# Altium PCB PCB_Proyecto_Analoga.PcbDoc
Units mil, origin at the board's own origin, x right, y up, seen from the top; angles counter-clockwise.
Board outline 3860 x 2615 mil, 2 copper layers (Top Layer, Bottom Layer); 40 components, 26 nets, 90 pads, 0 vias.
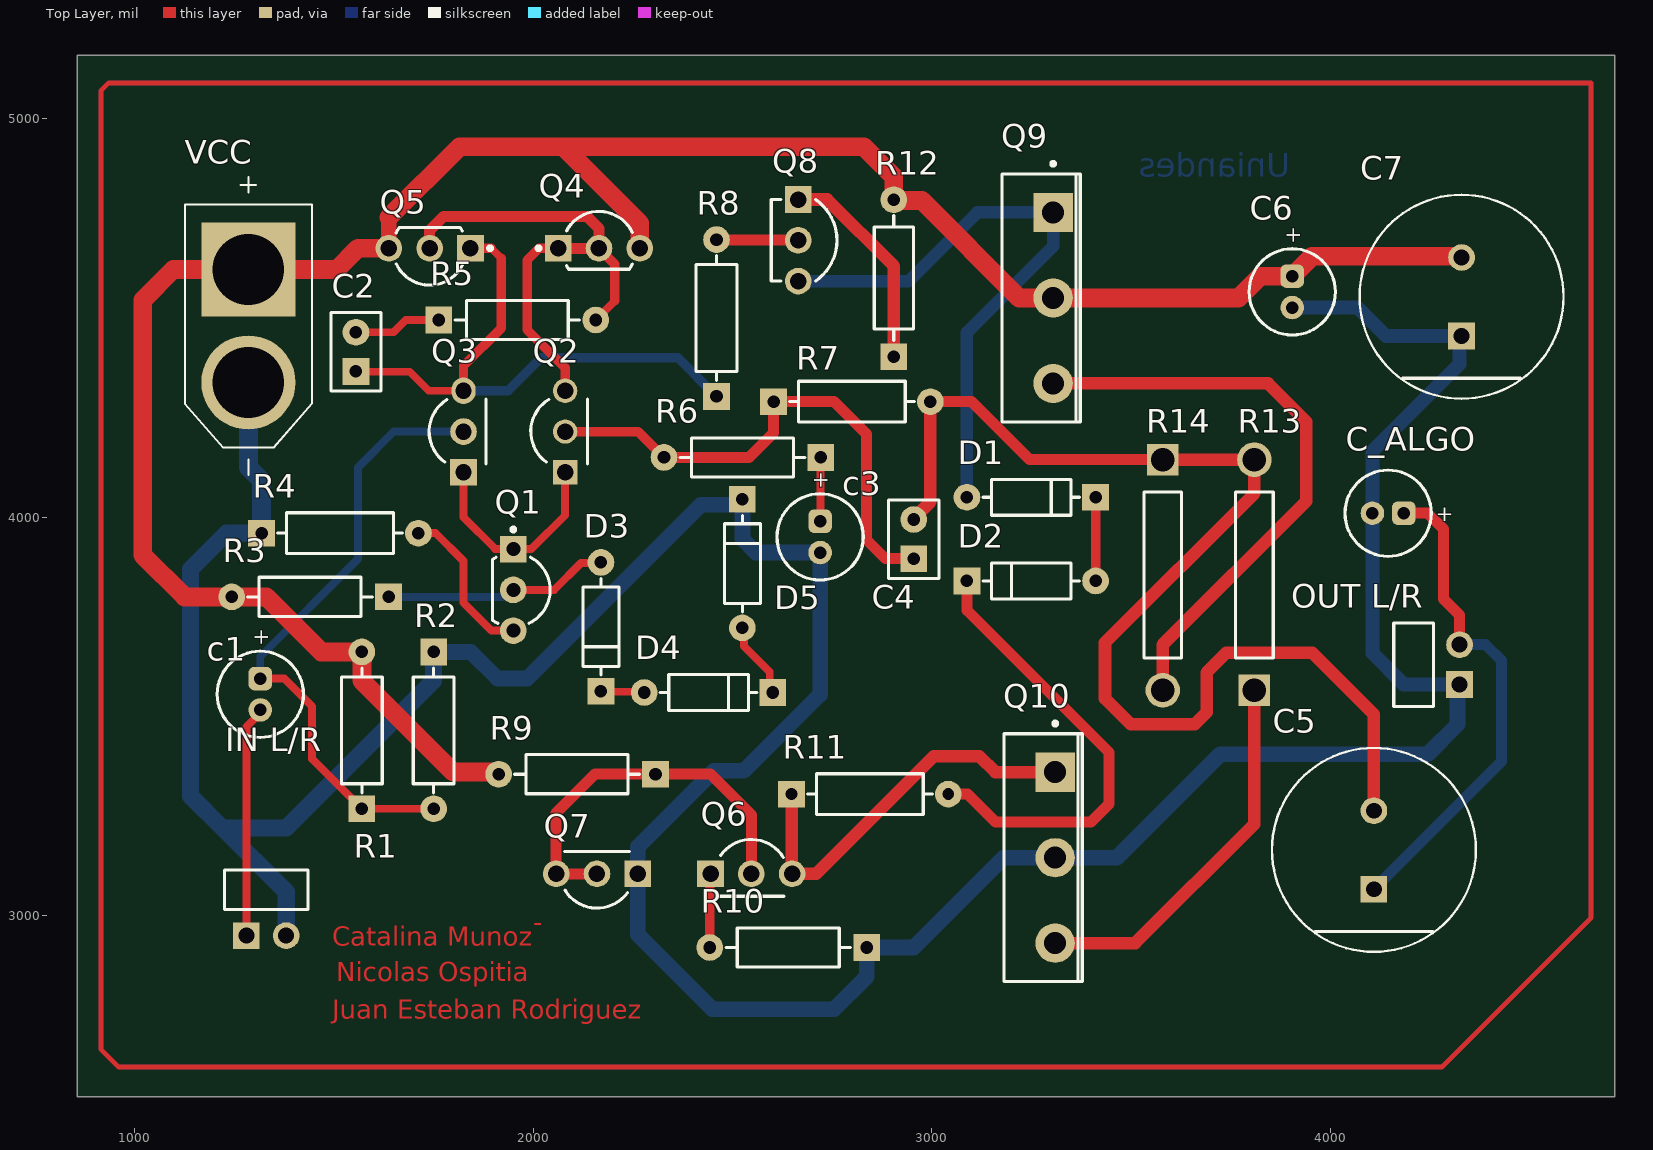
[diagram p0: Top Layer view]
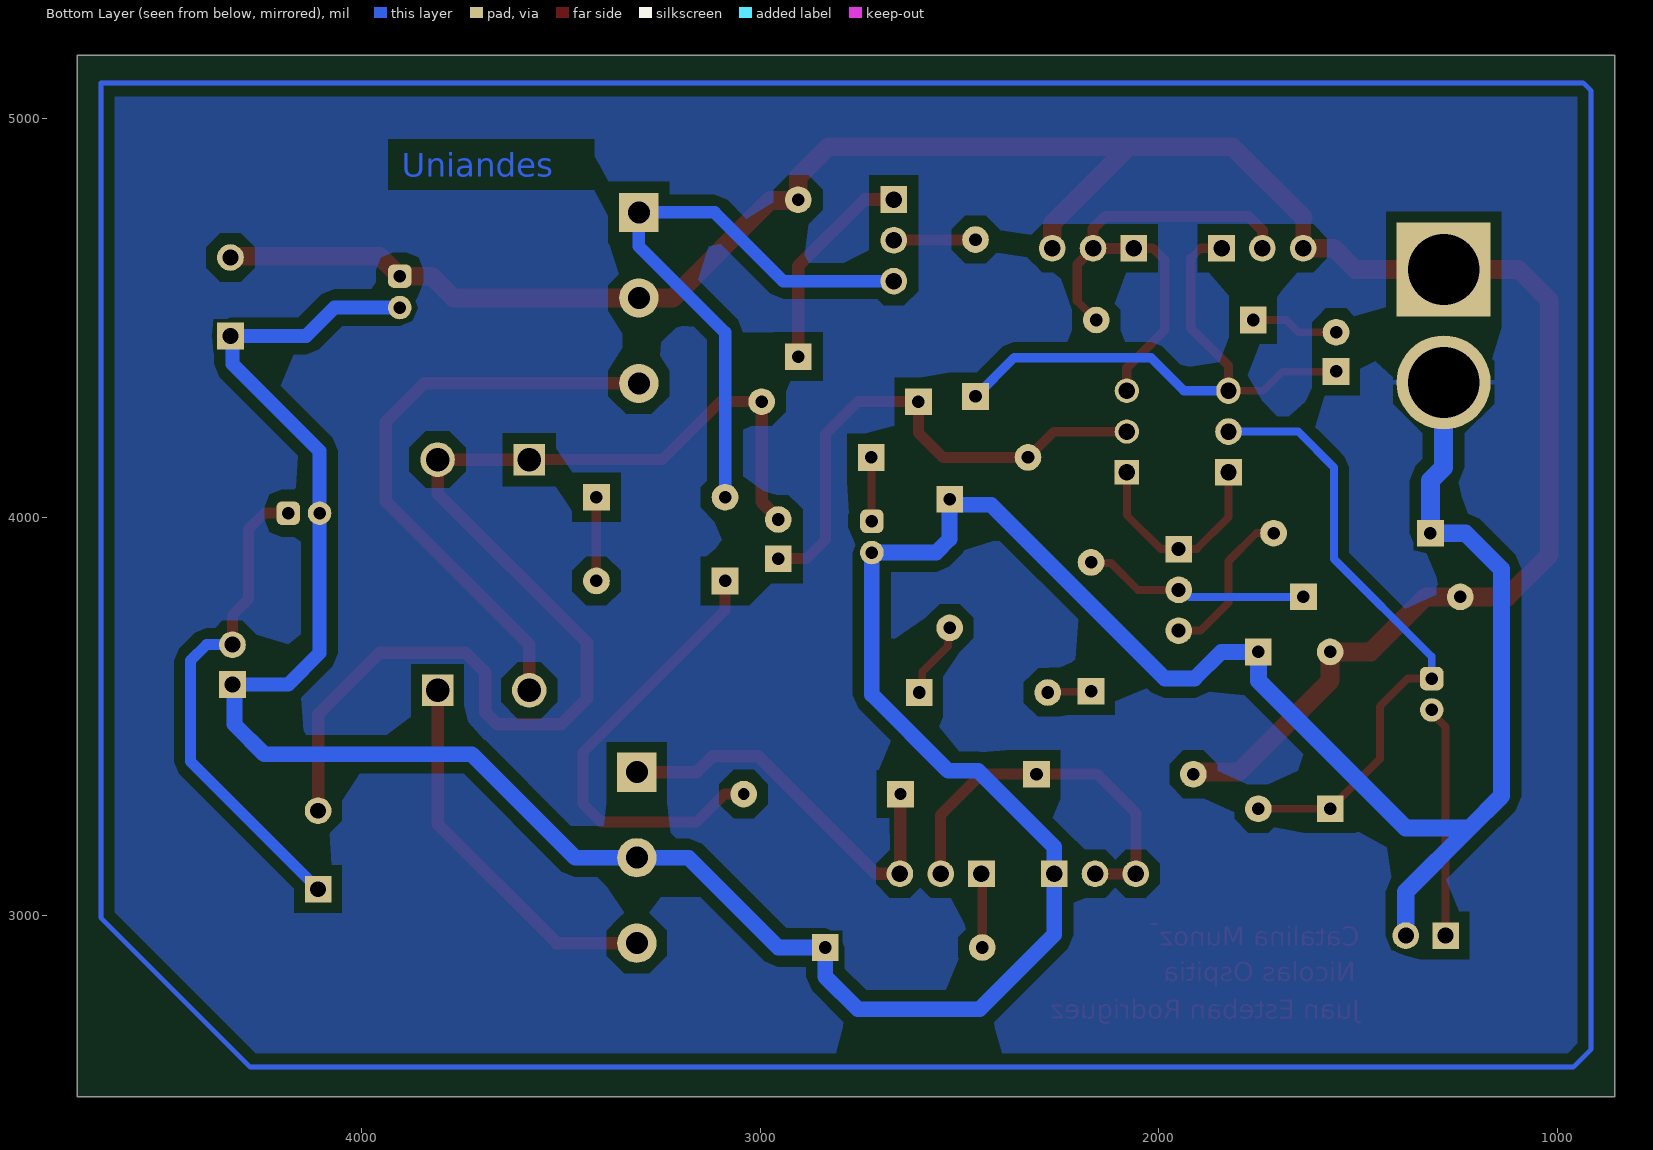
[diagram p1: Bottom Layer view, seen from below]
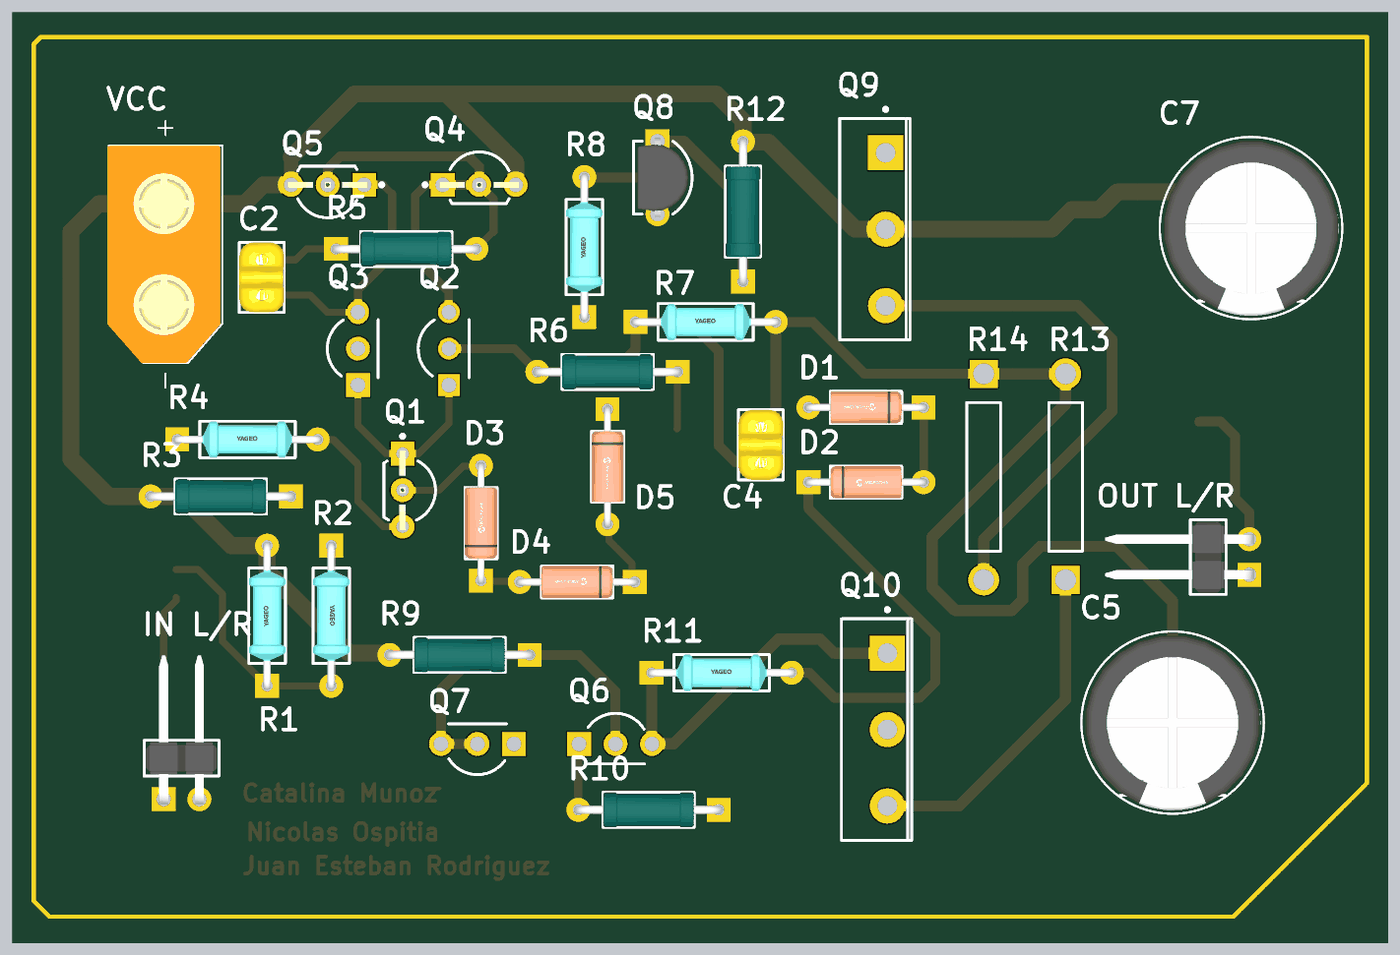
[diagram p2: 3D render of the assembled board from above, using the file's embedded part models]

## Layer stack, top to bottom
Top Solder: solder mask 0.4, Solder Resist, Dk 3.5
Top Layer: signal copper 1.4
Dielectric 1: dielectric 12.6, FR-4, Dk 4.8
Bottom Layer: signal copper 1.4
Bottom Solder: solder mask 0.4, Solder Resist, Dk 3.5

## Board outline
855,2545 4715,2545 4715,5160 855,5160

## Design rules (kind name [scope] priority, off if disabled: settings)
Clearance [All] p1: gap=19.68 ignorepadtopadclearanceinfootprint=FALSE except(23.62: Via-Fill Via-Poly Via-Region Fill-Text Fill-Hole Poly-Text Poly-Hole Region-Text Region-Hole; 25.59: Arc-Fill Arc-Poly Arc-Region Track-Fill Track-Poly Track-Region Fill-Fill Fill-Poly Fill-Region Poly-Poly Poly-Region Region-Region; 27.56: SMDPad-Fill SMDPad-Poly SMDPad-Region THPad-Fill THPad-Poly THPad-Region)
PolygonConnect [All] p1: connectstyle=Relief reliefconductorwidth=10 reliefentries=4 polygonreliefangle="90 Angle" airgapwidth=10
RoutingVias [All] p1: holewidth=28 width=50 viastyle="Through Hole" minholewidth=28 minwidth=50 maxholewidth=28 maxwidth=50
SolderMaskExpansion [All] p1: expansion=4 istentingtop=FALSE
Width [All] p1: maxlimit=59.06 minlimit=11.81 preferedwidth=23.62
30 further rules are at their usual default settings.

## Components (designator, comment, footprint, x,y, rotation, side; value= is the part's Value field where it differs from the comment)
c1 "47u" WCAP-ATG5_D5H11 -48685,53555.63 r90 top
C2 "1.5nF" FP-K105Z20Y5VF5TL2-MFG 1555,4415 r90 top value=1uF
c3 "47u" WCAP-ATG5_D5H11 -47280,53950.63 r90 top
C4 "1.5nF" FP-K105Z20Y5VF5TL2-MFG 2955,3945 r90 top value=1uF
C5 "2200uF, 25V" FP-RAD-TH-D_12_5_0_5-L_35-MFG 4110,3165 r90 top
C6 "10u, 25V" WCAP-ATG5_D5H11 -46095,54565.63 r90 top
C7 "2200uF, 25V" FP-RAD-TH-D_12_5_0_5-L_35-MFG 4330,4553.43 r90 top
C_ALGO "ALGO" WCAP-ATG5_D5H11 54145.63,54010 r0 top
D1 "1N4148" FP-DO-35-MFG 3250,4050 r180 top
D2 "1N4148" FP-DO-35-MFG 3250,3840 r0 top
D3 "1N4148" FP-DO-35-MFG 2170,3725 r90 top
D4 "1N4148" FP-DO-35-MFG 2440,3560 r180 top
D5 "1N4148" FP-DO-35-MFG 2525,3883.58 r270 top
"IN L/R" "Audio IN" FP-22-28-8020-MFG 1330,3065 r0 top
"OUT L/R" "Speaker" FP-22-28-8020-MFG 4209.84,3630 r90 top
Q1 "BC548" ONSC-TO-92-3-29-11_AM_BL#1 1950,3817.64 r270 top
Q2 "2N2222" FAIR-TO-92-3#1 2080,4215 r90 top
Q3 "2N2222" FAIR-TO-92-3#2 1825,4215 r90 top
Q4 "BC558" ONSC-TO-92-3-29-11_AM_BL#2 2165,4675 r0 top
Q5 "BC558" ONSC-TO-92-3-29-11_AM_BL#2 1740,4675 r180 top
Q6 "NTE123AP" FAIR-TO-92-3#3 2547.36,3105 r0 top
Q7 "NTE123AP" FAIR-TO-92-3#3 2160,3105 r180 top
Q8 "NTE159" FP-135AR-MFG 2680,4695 r0 top
Q9 "D718" ONSC-TO-3P-3LD-3-340AB-01 3305,4550.43 r0 top
Q10 "B688" ONSC-TO-3P-3LD-3-340AB-01 3310,3145.43 r0 top
R1 "10k, 1%, 0.6W" FP-MF0207-MFG#1 1570,3465 r90 top
R2 "10k, 1%, 0.6W" FP-MF0207-MFG#1 1750,3465 r270 top
R3 "8.2k, 1%, 0.6W" FP-MRS25-MFG 1440,3800 r180 top
R4 "2.7k, 1%, 0.6W" FP-MF0207-MFG#1 1515,3960 r0 top
R5 "100, 1%. 0.6W" FP-MRS25-MFG 1960,4495 r0 top
R6 "100, 1%. 0.6W" FP-MRS25-MFG 2525,4150 r180 top
R7 "5k, 1%, 0.6W" FP-MF0207-MFG#1 2800,4290 r0 top
R8 "10k, 1%, 0.6W" FP-MF0207-MFG#1 2460,4500 r90 top
R9 "470, 1%, 0.6W" FP-MRS25-MFG 2110,3355 r180 top
R10 "10, 1%, 0.6W" FP-MRS25-MFG 2640,2920 r180 top
R11 "300, 1%, 0.6W" FP-MF0207-MFG#2 2845,3305 r0 top
R12 "10, 1%, 0.6W" FP-MRS25-MFG 2905,4600 r90 top
R13 "1 ohm, 1%, 2w" RESA86-1060X240 3810,3855 r90 top
R14 "1 ohm, 1%, 2w" RESA86-1060X240 3580,3855 r270 top
VCC "XT60-M" AMASS_XT60-M 1285,4480 r270 top

## Footprints (in the part's own frame and the unit in brackets; to place one, negate y for a bottom-side part, rotate by r counter-clockwise, add the part's x,y. Pads: shape width x height; smd on the part's side, far side on the other; paste and mask are expansions set on the pad)
AMASS_XT60-M [mm]
  round 6 hole 4.55: N(3.6,0)
  rect 6x6 / inner round 6 / far side rect 6x6 hole 4.55: P(-3.6,0)
  silkscreen extent -9.5,-4.05 9.5,4.05, body extent -7.75,-4.16 7.75,3.94, height 16.03
FAIR-TO-92-3#1 [mm] "TO, 3-Leads, Body Dia 4.79mm, Pitch 2.6mm"
  rect 1.55x1.55 hole 1.05: 1(-2.6,0)
  round 1.55 hole 1.05: 2(0,0) 3(2.6,0)
  silkscreen extent -2.07,-1.43 2.07,2.19, body extent -2.4,-1.47 2.4,2.2, height 8.49
FAIR-TO-92-3#2 [mm] "TO, 3-Leads, Body Dia 4.79mm, Pitch 2.6mm"
  rect 1.7x1.7 hole 1.05: 1(-2.6,0)
  round 1.7 hole 1.05: 2(0,0)
  oval 1.7x1.55 hole 1.05: 3(2.6,0)
  silkscreen extent -2.07,-1.43 2.07,2.19, body extent -2.4,-1.47 2.4,2.2, height 8.49
FAIR-TO-92-3#3 [mm] "TO, 3-Leads, Body Dia 4.79mm, Pitch 2.6mm"
  rect 1.7x1.7 hole 1.05: 1(-2.6,0)
  round 1.7 hole 1.05: 2(0,0) 3(2.6,0)
  silkscreen extent -2.07,-1.43 2.07,2.19, body extent -2.4,-1.47 2.4,2.2, height 8.49
FP-22-28-8020-MFG [mm]
  rect 1.7x1.7 hole 1.02 paste-1000 mask+0: 1(-1.27,-2.925)
  round 1.7 hole 1.02 paste-1000 mask+0: 2(1.27,-2.925)
  silkscreen extent -2.67,-1.27 2.67,1.27, body extent -2.77,-3.81 2.77,7.95, height 0.25
FP-135AR-MFG [mm]
  rect 1.7x1.7 hole 1.05 paste-1000 mask+0: 1(-0.38,2.6)
  round 1.7 hole 1.05 paste-1000 mask+0: 2(-0.38,0) 3(-0.38,-2.6)
  silkscreen extent -2.09,-2.6 2.09,2.6, body extent -2.19,-3.42 2.19,3.42, height 0.25
FP-DO-35-MFG [mm]
  rect 1.7x1.7 hole 0.8 paste-1000 mask+0: 1(-4.1,0)
  round 1.7 hole 0.8 paste-1000 mask+0: 2(4.1,0)
  silkscreen extent -3.08,-1.14 3.08,1.14, body extent -4.82,-1.24 4.82,1.24, height 0.25
FP-K105Z20Y5VF5TL2-MFG [mm]
  rect 1.7x1.7 hole 0.8 paste-1000 mask+0: 1(-1.25,0)
  round 1.7 hole 0.8 paste-1000 mask+0: 2(1.25,0)
  silkscreen extent -2.5,-1.6 2.5,1.6, body extent -2.6,-1.7 2.6,1.7, height 0.25
FP-MF0207-MFG#1 [mm]
  rect 1.7x1.7 hole 0.8 paste-1000 mask+0: 1(-5,0)
  round 1.7 hole 0.8 paste-1000 mask+0: 2(5,0)
  silkscreen extent -3.98,-1.3 3.98,1.3, body extent -5.72,-1.4 5.72,1.4, height 0.25
FP-MF0207-MFG#2 [mm]
  rect 1.7x1.7 hole 0.75 paste-1000 mask+0: 1(-5,0)
  round 1.7 hole 0.75 paste-1000 mask+0: 2(5,0)
  silkscreen extent -3.98,-1.3 3.98,1.3, body extent -5.72,-1.4 5.72,1.4, height 0.25
FP-MRS25-MFG [mm]
  rect 1.7x1.7 hole 0.8 paste-1000 mask+0: 1(-5,0)
  round 1.7 hole 0.8 paste-1000 mask+0: 2(5,0)
  silkscreen extent -3.98,-1.25 3.98,1.25, body extent -5.72,-1.35 5.72,1.35, height 0.25
FP-RAD-TH-D_12_5_0_5-L_35-MFG [mm]
  rect 1.7x1.7 hole 1 paste-1000 mask+0: 1(-2.5,0)
  round 1.7 hole 1 paste-1000 mask+0: 2(2.5,0)
  silkscreen extent -6.5,-6.5 6.5,6.5, body extent -6.6,-6.6 6.6,6.6, height 0.25
ONSC-TO-3P-3LD-3-340AB-01 [mm] "FM, 3-Leads, Body 15.8x5mm, Pitch 5.45mm"
  rect 2.5x2.5 hole 1.4: 1(0,5.45)
  round 2.5 hole 1.4: 2(0,0) 3(0,-5.45)
  silkscreen extent -3.27,-7.9 1.73,8.67, body extent -3.27,-7.9 1.73,7.9, height 23.8
ONSC-TO-92-3-29-11_AM_BL#1 [mm] "TO, 3-Leads, Body Dia 4.7mm, Pitch 2.6mm"
  rect 1.7x1.7 hole 0.9: 1(-2.6,0)
  round 1.7 hole 0.9: 2(0,0) 3(2.6,0)
  silkscreen extent -3.97,-1.34 2.13,2.35, body extent -2.84,-1.34 2.84,2.35, height 5.33
ONSC-TO-92-3-29-11_AM_BL#2 [mm] "TO, 3-Leads, Body Dia 4.7mm, Pitch 2.6mm"
  rect 1.7x1.7 hole 1.05: 1(-2.6,0)
  round 1.7 hole 1.05: 2(0,0) 3(2.6,0)
  silkscreen extent -3.97,-1.34 2.13,2.35, body extent -2.84,-1.34 2.84,2.35, height 5.33
RESA86-1060X240 [mm] "Axial Resistor, 2-Leads, Dia 2.4mm, Body Length 10.6mm"
  rect 2x2 hole 1.5: 1(-7.35,0)
  round 2.2 hole 1.5: 2(7.35,0)
  silkscreen extent -5.3,-1.2 5.3,1.2, body extent -5.3,-1.2 5.3,1.2, height 2.4
WCAP-ATG5_D5H11 [mm] "Aluminum Electrolytic Capacitors, 5x11mm"
  rrect50% 1.5x1.5 hole 0.8: 1(-1269,-1270)
  round 1.5 hole 0.8: 2(-1271,-1270)
  silkscreen extent -1272.75,-1272.75 -1267.25,-1267.25, body extent -1272.49,-1272.5 -1267.5,-1267.5, height 11.31

## Part data
c1 c3 C6 C_ALGO: library part CMP-03913-53914185-1, "860020472003 WCAP-ATG5 Aluminum Electrolytic Capacitors", Capacitance=10µF, Case/Package=Radial, Leakage Current=3µA, Max Operating Temperature=105°C, Min Operating Temperature=-40°C, Ripple Current=38mA, Tolerance=20%, Voltage Rating=25V, Diameter=5mm, Height - Seated (Max)=12.4968mm, Lead Pitch=2.0066mm, Length=11mm, Life (Hours)=2000hours, Mount="Through Hole", NexarPartId=53914185, Packaging="Tape & Box (TB)", Pitch=2mm, Polarity=Polar, RoHS=Compliant
C2 C4: library part CMP-02417-000003-1, "CAP CER 1UF 50V Y5V RADIAL", Capacitance=1uF, Manufacturer="Vishay BC Components", Manufacturer Part Number=K105Z20Y5VF5TL2, Temperature="-30°C to +85°C", Temperature Characteristic=Y5V, Temperature Range High=+85°C, Temperature Range Low=-30°C, Tolerance=-20+80%, Voltage Rating=50V, Automotive=No, Category=Cap, ComponentLink2Description=Datasheet, ComponentLink2URL=https://www.vishay.com/docs/45171/kseries.pdf, Device Class L1="Passive Components", Device Class L2=Capacitors, Device Class L3="Ceramic Capacitors", Digikey Description="CAP CER 1UF 50V Y5V RADIAL", Height=6.6mm, Lead Free=Yes, Material=Ceramic, Mouser Description="Multilayer Ceramic Capacitors MLCC - Leaded 1uF 50volts +80/-20% Y5V 2.5mm LS", Octopart=https://octopart.com/k105z20y5vf5tl2-vishay-39475252, Package=K105Z20Y5VF5TL2, RoHS=TRUE
C5 C7: library part CMP-05427-000597-1, "Aluminum Electrolytic Capacitors (Radial Lead Type) AEC-Q200 Qualified 2200uF ±20% 25V", Capacitance=2.2mF, Case/Package=Radial, Dielectric Material=Aluminium, ESR (Equivalent Series Resistance)=22mR, Leakage Current=3uA, Max Operating Temperature=105°C, Min Operating Temperature=-55°C, Package Quantity=100, Ratings=AEC-Q200, Ripple Current=2.51A, Tolerance=20%, Voltage=25V, Construction=RADIAL, Contact Plating=Tin, Diameter=12.5mm, Height=35mm, Height - Seated (Max)=1.378inch, Impedance=22mR, Lead Diameter=0.8mm, Lead Free="Lead Free", Lead Pitch=5mm, Length=35mm, Life (Hours)=5000Hour, Mount="Through Hole", Packaging=Bulk, Radiation Hardening=No, REACH SVHC="No SVHC", RoHS Compliant=Yes, Series=FC, Termination=Radial, Voltage Rating=25V, Voltage Rating (DC)=25V
D1 D2 D3 D4 D5: library part CMP-06359-000016-1, "DIODE GEN PURP 75V 200MA DO35"
"IN L/R" "OUT L/R": library part CMP-00257-00131383-2, "22-28-8020 Board Connector, 2 Contact(S), 1 Row(S), Male, Right Angle, 0.1 Inch Pitch, Solder Terminal,", Color=Black, Contact Resistance=20mΩ, Current Rating=4A, Flammability Rating="UL94 V-0", Manufacturer Lifecycle Status=ACTIVE, Max Operating Temperature=75°C, Max Voltage Rating (DC)=250.25kV, Min Operating Temperature=-40°C, Voltage Rating=250V, Contact Material=Brass, Contact Plating=Tin, Country of Origin=US, Gender=Male, Glow Wire Compliant=Non-compliant, Height=2.74mm, Housing Color=Black, Housing Material=Thermoplastic, Lead Free="Lead Free", Lead Pitch=2.54mm, Lifecycle Status=Production, Mount="Through Hole", NexarPartId=131383, Number of Circuits=2, Number of Contacts=2, Number of Positions=2, Number of Rows=1, Orientation="Right Angle", Packaging=Bulk, Pitch=2.54mm, Plating=Tin, Radiation Hardening=No, REACH SVHC=Unknown, RoHS=Compliant, Termination="Through Hole", Voltage Rating (DC)=250V
Q1: library part CMP-1048-01603-1, "Amplifier Transistor, NPN Silicon, 3-Pin TO-92, Pb-Free, Tape and Reel", Manufacturer="On Semiconductor", PartNumber=BC548BRL1G, ComponentLink1Description="Manufacturer URL", ComponentLink1URL=http://www.onsemi.com/, ComponentLink2Description=Datasheet, ComponentLink2URL=http://www.onsemi.com/pub_link/Collateral/BC546-D.PDF, ComponentLink3Description="Package Specification", ComponentLink3URL=http://www.onsemi.com/pub_link/Collateral/MAC97-D.PDF, DatasheetVersion="Rev. 7", fT Min (MHz)=150, IC Continuous (A)=0.1, Mounting Technology="Through Hole", PackageDescription="3-Pin Transistor Outline, Body 4.825 x 3.685 mm, Pitch 1.27 mm", PackageReference=TO-92-3-29-11_AM_BL, PackageVersion="Rev. AM", Packing="Tape and Reel", Polarity=NPN, RoHS=TRUE
Q2 Q3 Q6 Q7: library part CMP-2000-06911-1, "NPN General-Purpose Amplifier, 40 V, -55 to 150 degC, 3-Pin TO-92, RoHS, Tape and Reel", Collector- Base Voltage VCBO=75V, Collector- Emitter Voltage VCEO Max=40V, Collector-Emitter Saturation Voltage=1V, DC Current Gain hFE Max=300, Emitter- Base Voltage VEBO=6V, Manufacturer=FairchildSemiconductor, Maximum DC Collector Current=1A, Maximum Operating Temperature=+150C, Maximum Power Dissipation=625mW, Minimum Operating Temperature=-55C, Package / Case=TO-92-3KinkedLead, Package Description="3-Pin Transistor Outline Package, Body Dia 4.79 mm, Pitch 2.6 mm", Package Reference=TO-92, <PCN>=http://www.mouser.com/PCN/3.26.10LTBDFairchild.pdf, Brand=FairchildSemiconductor, Configuration=Single, Datasheet URL=https://www.fairchildsemi.com/datasheets/PN/PN2222A.pdf, Datasheet Version="Rev. 1.1.0, 07/2014", DC Collector/Base Gain hfe Min=100, Factory Pack Quantity=2000, Gain Bandwidth Product fT=300MHz, Manufacturer URL=https://www.fairchildsemi.com/, Mounting Style=ThroughHole, Mounting Technology=ThroughHole, Packaging=Reel, Product Category=BipolarTransistors-BJT, RoHS=Details, Series=PN2222, Transistor Polarity=NPN, Unit Weight=0.008466oz
Q4 Q5: library part CMP-1048-01513-1, "Amplifier Transistor, PNP Silicon, 3-Pin TO-92, Pb-Free, Tape and Reel", Manufacturer="On Semiconductor", PartNumber=BC558BRL1G, ComponentLink1Description="Manufacturer URL", ComponentLink1URL=http://www.onsemi.com/, ComponentLink2Description=Datasheet, ComponentLink2URL=http://www.onsemi.com/pub_link/Collateral/BC556B-D.PDF, ComponentLink3Description="Package Specification", ComponentLink3URL=http://www.onsemi.com/pub_link/Collateral/MAC97-D.PDF, DatasheetVersion="Rev. 3", IC Continuous (A)=-0.1, Mounting Technology="Through Hole", PackageDescription="3-Pin Transistor Outline, Body 4.825 x 3.685 mm, Pitch 1.27 mm", PackageReference=TO-92-3-29-11_AM_BL, PackageVersion="Rev. AM", Packing="Tape and Reel", Polarity=PNP, RoHS=TRUE
Q8: library part CMP-00278-84408866-1, "2N3906TF Small Signal Bipolar Transistor, 0.2A I(C), 40V V(BR)CEO, 1-Element, PNP, Silicon, TO-92", Case/Package=TO-92, Collector Base Voltage (VCBO)=-40V, Collector Emitter Saturation Voltage=-400mV, Current Rating=-200mA, Emitter Base Voltage (VEBO)=-5V, Frequency=250MHz, Manufacturer Lifecycle Status=ACTIVE, Max Breakdown Voltage=160V, Max Junction Temperature (Tj)=150°C, Max Power Dissipation=625mW, Min Operating Temperature=-55°C, Collector Emitter Breakdown Voltage=-40V, Collector Emitter Voltage (VCEO)=-40V, Element Configuration=Single, Gain Bandwidth Product=250MHz, Height=5.33mm, hFE Min=100, Lead Free="Lead Free", Length=5.2mm, Lifecycle Status=Production, Max Collector Current=-200mA, Max Frequency=250MHz, Max Operating Temperature=150°C, Mount="Through Hole", NexarPartId=84408866, Number of Elements=1, Number of Pins=3, Packaging="Tape and Reel", Polarity=PNP, Power Dissipation=625mW, Radiation Hardening=No, REACH SVHC="No SVHC", RoHS=Compliant, Schedule B=8541210080, Transition Frequency=250MHz, Voltage Rating (DC)=-40V, Weight=240mg, Width=4.19mm
Q9: library part CMP-1046-00123-1, "Complementary NPN Silicon Power Bipolar Transistor, 3-Pin TO-3P-3LD, Pb-Free, Tube", Manufacturer="On Semiconductor", PartNumber=NJW3281G, ComponentLink1Description="Manufacturer URL", ComponentLink1URL=http://www.onsemi.com/, ComponentLink2Description=Datasheet, ComponentLink2URL=http://www.onsemi.com/pub_link/Collateral/NJW3281-D.PDF, ComponentLink3Description="Package Specification", ComponentLink3URL=http://www.onsemi.com/pub_link/Collateral/340AB.PDF, DatasheetVersion="Rev. 1", hFE Max=150, IC Continuous (A)=15, Mounting Technology="Through Hole", PackageDescription="3-Pin Flange Mount, Vertical Straight Lead, Body 15.6 x 4.8 mm, Pitch 5.45 mm", PackageReference=TO-3P-3LD-3-340AB-01, PackageVersion="Rev. A, 10/2007", Packing=Tube, Polarity=NPN, RoHS=TRUE
Q10: library part CMP-1030-00027-1, "Complementary PNP Silicon Power Bipolar Transistor, 3-Pin TO-3P-3LD, Pb-Free, Tube", Manufacturer="On Semiconductor", PartNumber=NJW1302G, ComponentLink1Description="Manufacturer URL", ComponentLink1URL=http://www.onsemi.com/, ComponentLink2Description=Datasheet, ComponentLink2URL=http://www.onsemi.com/pub_link/Collateral/NJW3281-D.PDF, ComponentLink3Description="Package Specification", ComponentLink3URL=http://www.onsemi.com/pub_link/Collateral/340AB.PDF, DatasheetVersion="Rev. 1", hFE Max=150, IC Continuous (A)=15, Mounting Technology="Through Hole", PackageDescription="3-Pin Flange Mount, Vertical Straight Lead, Body 15.6 x 4.8 mm, Pitch 5.45 mm", PackageReference=TO-3P-3LD-3-340AB-01, PackageVersion="Rev. A, 10/2007", Packing=Tube, Polarity=PNP, RoHS=TRUE
R1 R2 R4 R7 R8 R11: library part CMP-03413-000006-1, "RES 10K OHM 1% 0.6W AXIAL", Case/Package=Conformal, Max Operating Temperature=155°C, Min Operating Temperature=-55°C, Resistance=10kR, Resistor Type="Metal Film", Temperature Coefficient=50ppm/°C, Tolerance=1%, Construction=Cylindrical, Contact Plating=Tin, Diameter=2.4mm, Lead Free="Lead Free", Length=6.3mm, Military Standard=Not, Mount="Through Hole", Packaging="Ammo Pack", Radiation Hardening=No, RoHS Compliant=Yes, Termination=Axial
R3: library part CMP-02408-000049-1, "RES 953 OHM 0.6W 1% AXIAL", Case/Package=Axial, Max Operating Temperature=155°C, Max Power Dissipation=600mW, Min Operating Temperature=-55°C, Resistance=953R, Resistance Tolerance=1%, Resistor Type="Metal Film", Temperature Coefficient=50ppm/°C, Voltage Rating=350V, Construction=Cylindrical, Contact Plating=Tin, Diameter=2.5mm, Lead Free="Lead Free", Lead Length=26mm, Length=6.5mm, Military Standard=Not, Number of Terminations=2, Packaging="Tape and Reel", Power Rating=600mW, Radiation Hardening=No, RoHS Compliant=Yes, Series=MRS25, Technology="THIN FILM", Termination=Axial, Tolerance=1%, Width=2.5mm
R5 R6 R10 R12: library part CMP-00030-42757237-1, "MRS25000C1000FRP00 Resistor, 100 Ohm, ± 1%, 600 mW, Axial Leaded, Metal Film (Thin Film), Professional", Case/Package=Axial, Max Operating Temperature=155°C, Max Power Dissipation=600mW, Min Operating Temperature=-55°C, Resistance=100Ω, Temperature Coefficient=50ppm/°C, Tolerance=1%, Voltage Rating=350V, Composition="Metal Film, Thin Film", Contact Plating=Tin, Diameter=2.5mm, Lead Diameter=600µm, Lead Free="Lead Free", Length=6.5mm, Military Standard=Not, Mount="Through Hole", NexarPartId=42757237, Number of Pins=2, Number of Terminations=2, Packaging="Tape & Reel (TR)", Power Rating=600mW, Radiation Hardening=No, REACH SVHC=Unknown, RoHS=Compliant, Schedule B="8533210090, 8533210090", Termination=Axial, Voltage Rating (DC)=350V, Width=2.5mm
R9: library part CMP-02408-000051-1, "RES 1K OHM 0.6W 1% AXIAL", Case/Package=Axial, Max Operating Temperature=155°C, Max Power Dissipation=600mW, Min Operating Temperature=-55°C, Package Quantity=5000, Resistance=1kR, Resistance Tolerance=1%, Resistor Type="Metal Film", Temperature Coefficient=50ppm/°C, Voltage Rating=350V, Construction=Cylindrical, Contact Plating=Tin, Diameter=2.5mm, Lead Diameter=0.6mm, Lead Free="Lead Free", Length=6.5mm, Military Standard=Not, Mount="Through Hole", Number of Pins=2, Number of Terminations=2, Packaging="Tape and Reel", Power Rating=600mW, Radiation Hardening=No, RoHS Compliant=Yes, Series=MRS25, Technology="THIN FILM", Termination=Axial, Tolerance=1%, Voltage Rating (DC)=350V, Weight=0.00776oz, Width=2.5mm
R13 R14: library part CMP-1678-00005-1, "Axial Resistor, 50 mOhm, +/- 1%, 2 W, -55 to 275 degC, 2-Pin THD, RoHS, Bulk", Case\Package=SOIC, Max Dual Supply Voltage="16 V", Max Operating Temperature="70 degC", Min Dual Supply Voltage="1.5 V", Min Operating Temperature="0 degC", Nominal Dual Supply Voltage="12 V", Nominal Supply Current="1.2 mA", Nominal Voltage Gain="100 dB", Output Current="30 mA", Package Quantity=1, Bandwidth="700 KHz", Channels=2, Common Mode Rejection Ratio="65 dB", ComponentLink1Description="Manufacturer URL", ComponentLink1URL=http://www.ohmite.com/, ComponentLink2Description=Datasheet, ComponentLink2URL=http://www.ohmite.com/cat/res_10.pdf, DatasheetVersion=Jun-15, Height="1.58 mm", Length="4.9 mm", Max Supply Voltage="16 V", Min Supply Voltage="1.5 V", Mount="Surface Mount", Nominal Gain Bandwith Product="700 KHz", Nominal Supply Voltage="12 V", PackageDescription="2-Pin Axial Lead, Dia 2.4 mm, Body Length 10.6 mm", PackageReference=12FR050E, Packaging="Cut Tape", Pins=8, Radiation Hardening=No, REACH SVHC="No SVHC", RoHSCompliant=true, Slew Rate="0.3 V\us", Unity Gain Bandwidth Product="700 KHz", Width="3.91 mm"
VCC: library part CMP-245-000000-3, "Plug; DC supply; XT60; male; PIN: 2; for cable; soldered; 30A; 500V", Package=Package, Availability="Not in stock", Check_prices=https://www.snapeda.com/parts/XT60-M/AMASS/view-part/?ref=eda, Component Type=Standard, Design Item ID=XT60-M, MF=AMASS, MP=XT60-M, Pin Count=2, Price=None, SnapEDA_Link=https://www.snapeda.com/parts/XT60-M/AMASS/view-part/?ref=snap, Source=XT60-M.SchLib

## Nets (pads, with @x,y where several pads share a name; then routed paths per layer and width w, separated by ;. In a path a pad name is that pad's centre, name@x,y a point inside that pad or via, vN(x,y) a via of type N, cw(c..) or ccw(c..) an arc to the next point about the centre after c; other vN are vias at no path point)
GND: "IN L/R.2" "OUT L/R.1" c3.2 C6.2 C7.1 C_ALGO.2 D5.1 Q7.1 Q10.2 R2.1 R4.1 R10.1 VCC.N | length 9075.5
  Top Layer w19.68: Q7.1 Q7.1@2283.03,3084.33 ; R10.1@2835,2918.15 R10.1
  Bottom Layer w35.43: C6.2 4068.74,4526.26 4140,4455 C7.1 4325,4450 4325,4385 4106.26,4166.26 C_ALGO.2 4106.26,3658.74 4185,3580 4325,3580 4320,3575
  Bottom Layer w39.37: R2.1 1843.15,3661.85 1910,3595 1985,3595 2421.22,4031.22 2511.22,4031.22 D5.1 2525,3945 2558.74,3911.26 c3.2 2720,3555 2528.68,3363.68 2453.68,3363.68 2262.36,3172.36 Q7.1 2262.36,2952.36 2449.72,2765 2755,2765 2836.85,2846.85 R10.1 2955,2920 3180.43,3145.43 Q10.2 3464.57,3145.43 3724.13,3405 4245,3405 4320,3480 4320,3575
  Bottom Layer w43.31: R4.1 1230,3960 1140,3870 1140,3300 1220,3220 ; 1380,2949.84 1380,3060 1220,3220 ; R2.1@1749.59,3661.45 1749.59,3589.59 1380,3220 1220,3220
  Bottom Layer w47.24: VCC.N 1285,4125 1318.15,4091.85 R4.1 ; R2.1@1749.59,3661.45 R2.1
Netc1_1: c1.1 Q3.2 R1.1 R2.2 | length 1581.4
  Top Layer w19.68: c1.1 1375,3595 1445,3525 1445,3393.15 R1.1 R2.2
  Bottom Layer w19.68: c1.1 1315,3650 1560,3895 1560,4125 1650,4215 Q3.2
Netc1_2: "IN L/R.1" c1.2 | length 580.9
  Top Layer w19.68: 1280,2949.84 1280,3473.31 1315,3508.31 c1.2
NetC2_1: C2.1 Q3.3 Q5.1 R8.1 | length 1459.4
  Top Layer w19.68: C2.1 1555.79,4365 1690,4365 1737.64,4317.36 Q3.3 ; 1895,4675 1920,4650
  Top Layer w23.62: Q3.3 1825,4380 1920,4475 1920,4650 ; Q5.1 1895,4675
  Bottom Layer w23.62: Q3.3 1936.77,4317.36 2019.41,4400 2363.15,4400 R8.1
NetC2_2: C2.2 R5.1 | length 220.9
  Top Layer w19.68: C2.2 1649.21,4464.21 1680,4495 R5.1
Netc3_1: c3.1 R6.1 | length 160.8
  Top Layer w19.68: c3.1 2720.93,3990.93 2720.93,4149.07 R6.1
NetC4_1: C4.1 Q2.2 R6.2 R7.1 | length 1324.2
  Top Layer w23.62: Q2.2 2263.15,4215 R6.2
  Top Layer w27.56: R6.2 2541.3,4150 2603.15,4211.85 R7.1 2755,4290 2836.5,4208.5 2836.5,3943.5 2884.21,3895.79 C4.1
NetC4_2: C4.2 C5.2 R7.2 R13.2 R14.1 | length 3082.1
  Top Layer w19.68: C4.2 C4.2@2955,3996.98
  Top Layer w27.56: R7.2 3100,4290 3245.63,4144.37 R14.1
  Top Layer w31.5: C4.2@2955,3996.98 2996.85,4038.83 R7.2 ; R14.1 R13.2 3810,4060 3435,3685 3435,3545 3500,3480 3660,3480 3690,3510 3690,3610 3740,3660 3955,3660 4110,3505 C5.2
NetC5_1: "OUT L/R.2" C5.1 C_ALGO.1 | length 1250.7
  Top Layer w27.56: C_ALGO.1 4245,4010 4285,3970 4285,3795 4325,3755 4325,3680
  Bottom Layer w27.56: C5.1 4430,3386.57 4430,3640 4390,3680 4325,3680
NetD1_1: D1.1 D2.2 | length 210
  Top Layer w23.62: D2.2 D1.1
NetD1_2: D1.2 Q8.3 Q9.1 | length 1516
  Bottom Layer w31.5: Q8.3 2942.64,4592.64 3115,4765 Q9.1 3305,4680 3088.58,4463.58 D1.2
NetD2_1: D2.1 R11.2 | length 1158.4
  Top Layer w27.56: R11.2 3090,3305 3160,3235 3400,3235 3445,3280 3445,3410 3088.58,3766.42 D2.1
NetD3_1: D3.1 D4.2 | length 110.1
  Top Layer w19.68: D3.1 2171.79,3561.79 2276.79,3561.79 D4.2
NetD3_2: D3.2 Q1.2 R3.1 | length 568.9
  Top Layer w19.68: Q1.2 2052.64,3817.64 2120,3885 2168.58,3885 D3.2
  Bottom Layer w19.68: R3.1 1922.77,3800 1940.41,3817.64 Q1.2
NetD4_1: D4.1 D5.2 | length 193.8
  Top Layer w19.68: D5.2 2528.77,3718.39 2528.77,3676.23 2593.54,3611.46 2593.54,3567.88 D4.1
NetQ1_1: Q1.1 Q2.1 Q3.1 | length 543.6
  Top Layer w19.68: Q3.1 1825,4000 1904.44,3920.56 1949.44,3920.56 Q1.1 1995,3920 2080,4005 Q2.1
NetQ1_3: Q1.3 R4.2 | length 410.3
  Top Layer w19.68: R4.2 1755,3960 1825,3890 1825,3785.55 1895.28,3715.28 Q1.3 Q1.3@1943.22,3722.06
NetQ2_3: Q2.3 Q4.1 Q4.2 Q5.2 R5.2 | length 1314.1
  Top Layer w19.68: R5.2 2205,4543.15
  Top Layer w23.62: Q4.1 2014.74,4675 1985,4645.26 1985,4470 2080,4375 Q2.3 ; Q4.2@2165,4674.27 2205,4634.27 2205,4543.15
  Top Layer w27.56: Q5.2 1740,4720 1775,4755 2135,4755 2165,4725 Q4.2 ; Q4.1 Q4.2@2156.88,4675
NetQ6_1: Q6.1 R10.2 | length 185.8
  Top Layer w19.68: Q6.1@2443.15,3103.15 Q6.1
  Top Layer w23.62: R10.2 Q6.1@2443.15,3103.15
NetQ6_2: Q6.2 Q7.2 Q7.3 R9.1 | length 975.1
  Top Layer w27.56: Q7.2 Q7.3 2057.64,3257.64 2155,3355 R9.1 2445,3355 2547.36,3252.64 Q6.2
NetQ6_3: Q6.3 Q10.1 R11.1 | length 999.7
  Top Layer w19.68: R11.1 R11.1@2648.94,3304.21 ; Q6.3@2648.94,3105.79 Q6.3
  Top Layer w31.5: Q6.3@2648.94,3105.79 R11.1@2648.94,3304.21 ; Q6.3 2710,3105 3005,3400 3120,3400 3160,3360 Q10.1
NetQ8_1: Q8.1 R12.1 | length 536.1
  Top Layer w31.5: Q8.1 2737.64,4797.36 2905,4630 R12.1
NetQ8_2: Q8.2 R8.2 | length 205.8
  Top Layer w19.68: R8.2 R8.2@2460.93,4695.93 ; Q8.2@2664.11,4695.93 Q8.2
  Top Layer w27.56: R8.2@2460.93,4695.93 Q8.2@2664.11,4695.93
NetQ9_3: Q9.3 R14.2 | length 1498.2
  Top Layer w31.5: Q9.3 3844.13,4335.87 3940,4240 3940,4040 3580,3680 R14.2
NetQ10_3: Q10.3 R13.1 | length 959.5
  Top Layer w31.5: Q10.3 3510.87,2930.87 3810,3230 R13.1
VCC: C6.1 C7.2 Q4.3 Q5.3 Q9.2 R1.2 R3.2 R9.2 R12.2 VCC.P | length 5891
  Top Layer w19.68: Q4.3@2265,4677.36 Q4.3
  Top Layer w39.37: Q5.3 1637.64,4752.64 ; R9.2@1907.88,3360.27 R9.2 ; R12.2 R12.2@2906.85,4795 ; Q9.2@3304.57,4550 Q9.2
  Top Layer w47.24: Q5.3 1560,4675 1506.73,4621.73 VCC.P 1096.73,4621.73 1020,4545 1020,3905 1125,3800 R3.2 1330,3800 1468.15,3661.85 R1.2 1570,3590 1799.73,3360.27 R9.2@1907.88,3360.27 ; 1637.64,4752.64 1815,4930 2075,4930 ; Q4.3 2267.36,4737.64 2075,4930 ; R12.2 2905,4855 2830,4930 2075,4930 ; R12.2@2906.85,4795 2975,4795 3220,4550 Q9.2@3304.57,4550 ; Q9.2 3770.43,4550.43 3825,4605 C6.1 3955,4655 C7.2@4330,4655
copper on no net: | length 34391.8
  Top Layer w11.81: 915,2665 915,5070 ; 915,2665 960,2620 ; 915,2665 915,5070 ; 915,2665 960,2620 ; 915,5070 935,5090 ; 915,5070 935,5090 ; 935,5090 4655,5090 ; 935,5090 4655,5090 ; 960,2620 4280,2620 ; 960,2620 4280,2620 ; 4280,2620 4590,2930 ; 4280,2620 4590,2930 ; 4590,2930 4655,2995 ; 4590,2930 4655,2995 ; 4655,2995 4655,5090
  Bottom Layer w11.81: 915,2665 960,2620 4280,2620 4590,2930 4655,2995 4655,5090 935,5090 915,5070 915,2665

## Polygon pours and split planes (outlines as drawn)
GND on Bottom Layer "GND_L02_P000" (solid, remove dead copper, pour order 0): 855,2545 4715,2545 4715,5160 855,5160

## Other copper
Top Layer:
  text "-" at 2000,2961.39 h47.24
  text "Catalina Munoz" at 1495,2925 h47.24
  text "Nicolas Ospitia" at 1505,2835.74 h47.24
  text "Juan Esteban Rodriguez" at 1495,2740.74 h47.24
Bottom Layer:
  text "Uniandes" at 3900,4855 h60

## Silkscreen, mask and mechanical layers (free items; w line width, h text height)
Top Solder:
  lines w11.81: 915,2665 960,2620 4280,2620 4590,2930 4655,2995 4655,5090 935,5090 915,5070 915,2665
Bottom Solder:
  lines w11.81: 915,2665 960,2620 4280,2620 4590,2930 4655,2995 4655,5090 935,5090 915,5070 915,2665

## Text inside footprints (layer, text, board x,y; h text height)
c1: Top Overlay "+" at 1334.68,3675.71 h39.37 r90
c3: Top Overlay "+" at 2739.68,4070.71 h39.37 r90
C6: Top Overlay "+" at 3924.68,4685.71 h39.37 r90
C_ALGO: Top Overlay "+" at 4265.71,3990.32 h39.37